# Altium PCB omnibothub-power-one-usb.PcbDoc
Units mil, origin at the board's own origin, x right, y up, seen from the top; angles counter-clockwise.
Board outline 1230.8 x 3070.8 mil, 2 copper layers (Top Layer, Bottom Layer); 4 components, 3 nets, 21 pads, 4 vias.
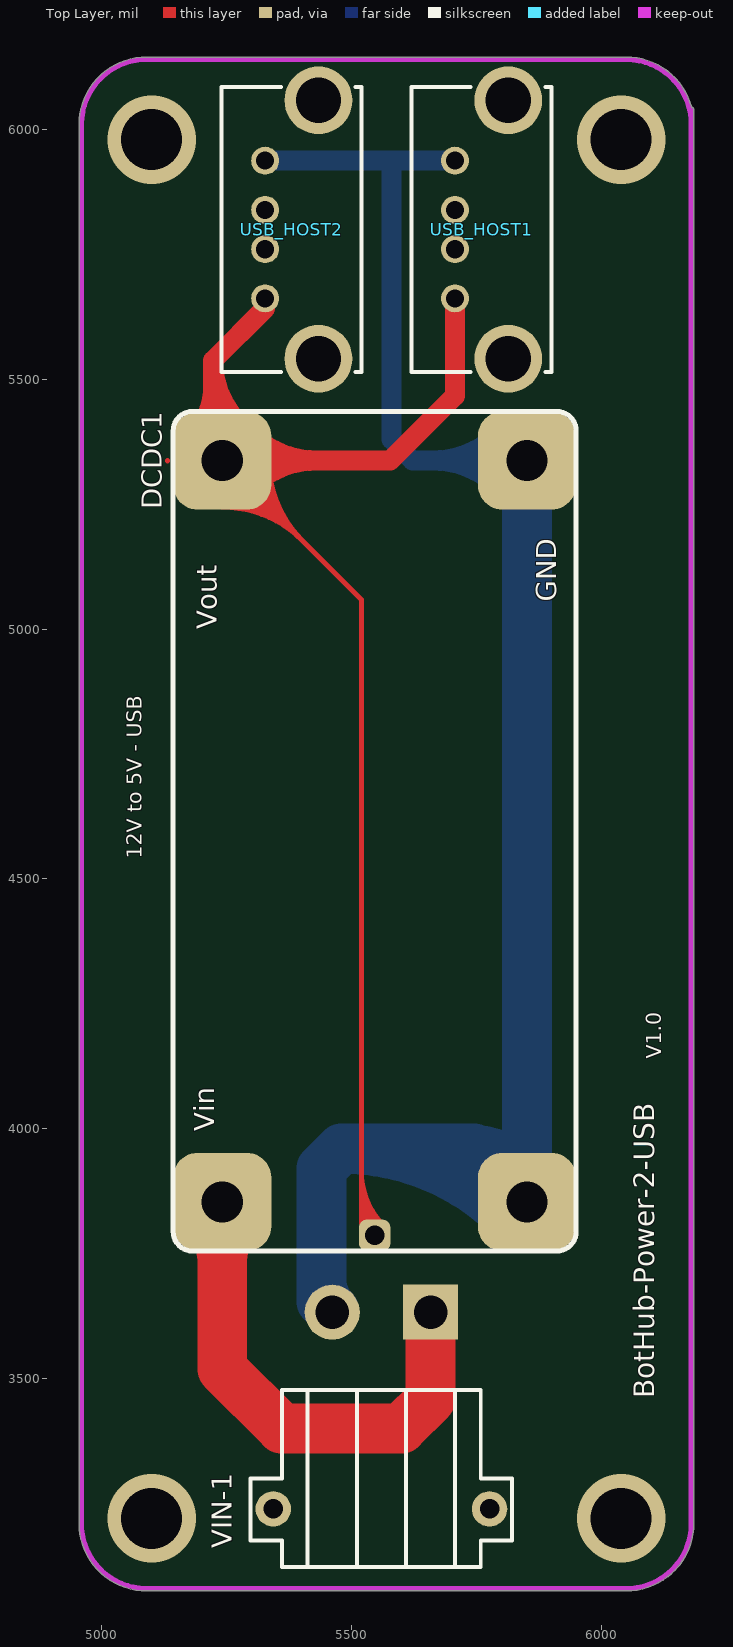
[diagram p0: Top Layer view]
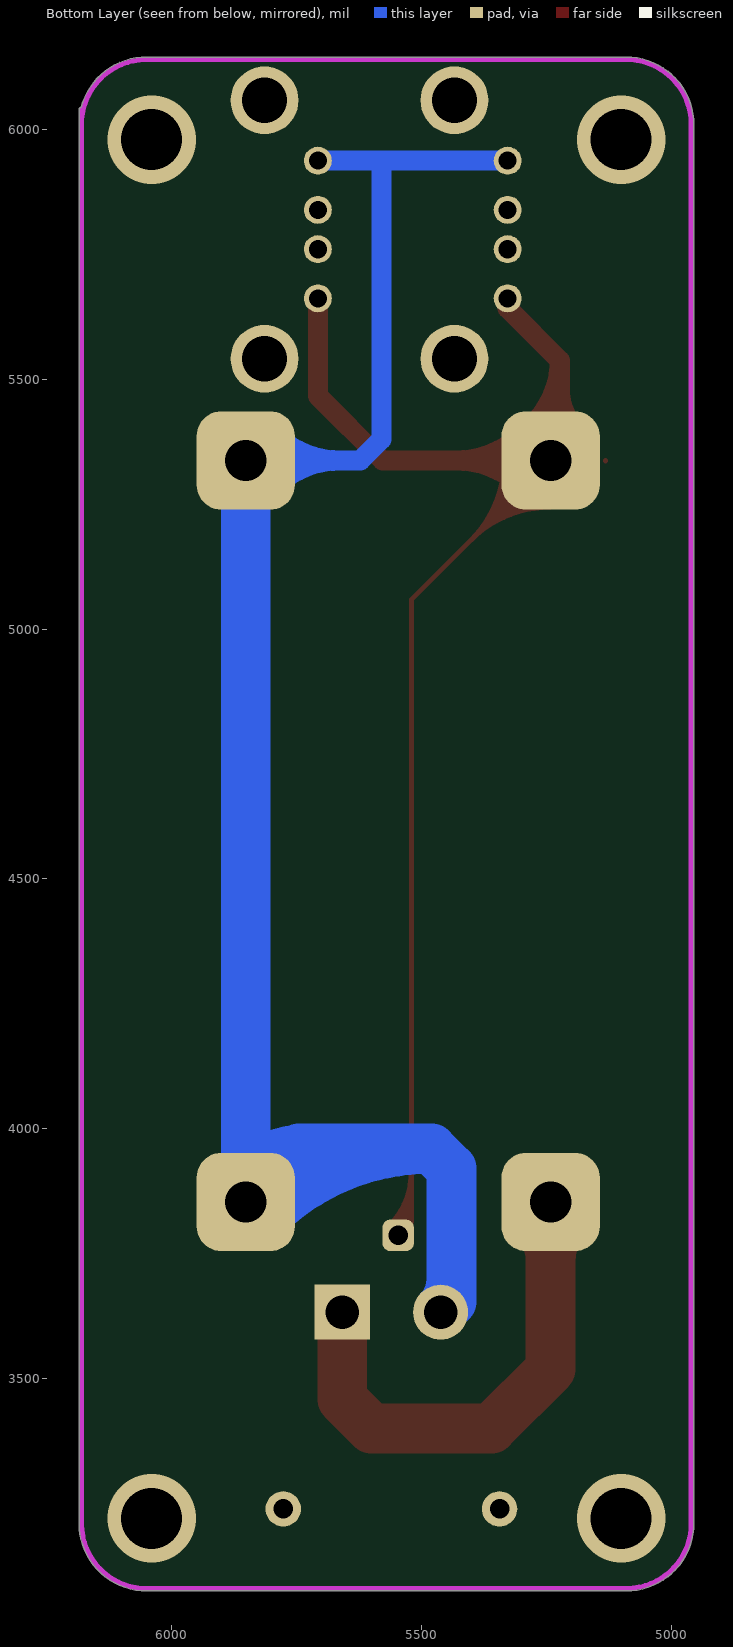
[diagram p1: Bottom Layer view, seen from below]

## Layer stack, top to bottom
Top Layer: signal copper 1.4
Dielectric: core 12.6, FR-4, Dk 4.8
Bottom Layer: signal copper 1.4

## Board outline
4955,3199.62 cw(c4960,3200) 4954.98,3200 4954.98,5999.81 cw(c5090,6010) 4955,6020.38 cw(c5090,6010) 5079.62,6145 cw(c5080,6140) 5080,6145.02 6039.81,6145.02 cw(c6050,6010) 6060.38,6145 cw(c6050,6010) 6180.81,6044.95 cw(c6180,6040) 6185.02,6040 6185.02,3220.19 cw(c6050,3210) 6185.4,3210 cw(c6050,3210) 6185,3199.62 cw(c6050,3210) 6060.38,3075 cw(c6060,3080) 6060,3074.99 5100.19,3074.99 cw(c5090,3210) 5079.62,3075 cw(c5090,3210)

## Design rules (kind name [scope] priority, off if disabled: settings)
Clearance Clearance_3 [(InPolygon) vs InNet('VCC_DJ')] p1: gap=30
Clearance Clearance_2 [(InPolygon) vs InNet('POWER')] p2: gap=30
Clearance Clearance_1 [(InPolygon)] p3: gap=10
Clearance [All] p4: gap=6
PlaneConnect [All] p1: planeconnectstyle=Direct reliefexpansion=20 reliefentries=4 reliefconductorwidth=10 reliefairgap=10
PolygonConnect [All] p1: connectstyle=Direct reliefconductorwidth=10 reliefentries=4 polygonreliefangle="90 Angle"
RoutingVias [All] p1: holewidth=28 width=50 viastyle="Through Hole" minholewidth=16 minwidth=25 maxholewidth=28 maxwidth=50
SilkscreenOverComponentPads [All] p1: minsilkscreentomaskgap=10
SolderMaskExpansion [All] p1: expansion=4
TestPointUsage FabricationTestPointUsage [All] p1: valid=0 allowmultiple=FALSE
Testpoint FabricationTestpoint [All] p1: side=3 testpointundercomponent=TRUE minsize=40 maxsize=100 preferedsize=60 minholesize=0 maxholesize=40 preferedholesize=32 testpointgrid=1 style=297 order=0-112345678
Width [All] p1: maxlimit=100 minlimit=10 preferedwidth=10 minimp=50.000000 maximp=50.000000 favimp=50.000000
22 further rules are at their usual default settings.

## Components (designator, comment, footprint, x,y, rotation, side; value= is the part's Value field where it differs from the comment)
DCDC1 "Header 2X2" DCDC-1 5480,4500 r90 top locked
USB_HOST1 "USB-A" 614004135023 5760,5800 r90 top
USB_HOST2 "USB-A" 614004135023 5380,5800 r90 top
VIN-1 "Header 2" AMASS-XT30PW-M 5560,3300 r180 top

## Footprints (in the part's own frame and the unit in brackets; to place one, negate y for a bottom-side part, rotate by r counter-clockwise, add the part's x,y. Pads: shape width x height; smd on the part's side, far side on the other; paste and mask are expansions set on the pad)
614004135023 [mm] "USB 2.0 Type A Vertical"
  round 1.42 hole 0.92: 1(-3.5,1.34) 2(-1,1.34) 3(1,1.34) 4(3.5,1.34)
  round 3.45 hole 2.3: Shell(-6.57,-1.37) Shell(6.57,-1.37)
  silkscreen extent -7.25,-3.56 7.25,3.56
AMASS-XT30PW-M [mm] "TH, 4-Leads, Body 13.95x13.3mm"
  rect 2.8x2.8 hole 1.7: 1(-2.5,-8.45)
  round 2.8 hole 1.7: 2(2.5,-8.45)
  round 1.8 hole 1: MP1(-5.5,1.55) MP2(5.5,1.55)
  silkscreen extent -6.65,-4.5 6.65,4.5
DCDC-1 [mm] "TH, 4-Leads, Body 13.95x13.3mm"
  rrect50% 5x5 hole 2.1: 1(-16.423,6.062) 2(21.277,6.062) 3(-16.423,-9.438) 4(21.277,-9.438)
  rrect50% 1.6x1.6 hole 1: 2(-18.123,-1.688)
  silkscreen extent -18.92,-11.94 23.78,8.56

## Part data
DCDC1: "Header, 2-Pin, Dual row"
VIN-1: "Header, 2-Pin"

## Via types
v1: diameter 177.17, hole 122.05, Top Layer to Bottom Layer, 4 vias

## Nets (pads, with @x,y where several pads share a name; then routed paths per layer and width w, separated by ;. In a path a pad name is that pad's centre, name@x,y a point inside that pad or via, vN(x,y) a via of type N, cw(c..) or ccw(c..) an arc to the next point about the centre after c; other vN are vias at no path point)
GND: DCDC1.3 DCDC1.4 USB_HOST1.4 USB_HOST2.4 VIN-1.2 | length 4550.7
  Bottom Layer w40: USB_HOST2.4@5347.24,5937.81 5580,5937.81 ; USB_HOST1.4@5687.24,5937.81 5580,5937.81 ; DCDC1.4@5796.12,5282.22 ccw(c5662.24,5148.34) 5662.24,5337.68 ccw(c5662.24,5527.01) DCDC1.4@5796.12,5393.13 ; DCDC1.4 5622.32,5337.68 5580,5380 5580,5937.81
  Bottom Layer w100: 5440,3697.12 ccw(c5526.02,3697.12) VIN-1.2@5465.19,3636.3 ; VIN-1.2 5440,3654.25 5440,3920 5480,3960 ; 5719.73,3960 cw(c5719.73,3722.9) DCDC1.3@5888.23,3889.71 ; DCDC1.3@5803.15,3853.43 ccw(c5686.24,3853.43) 5768.91,3936.09 ccw(c5851.57,4018.76) DCDC1.3@5851.57,3901.85 ; DCDC1.3@5817.16,3819.36 ccw(c5480.02,3485.58) 5480.02,3960 ; DCDC1.4 DCDC1.3 5745,3960 5480,3960
V5-1: DCDC1.2 USB_HOST1.1 USB_HOST2.1 | length 5371.4
  Top Layer w10: DCDC1.2@5241.34,5244.25 cw(c5241.34,5018.7) 5400.83,5178.19 cw(c5560.31,5337.68) DCDC1.2@5334.76,5337.68 ; DCDC1.2@5241.34,5254.25 cw(c5241.34,5052.85) 5383.75,5195.26 cw(c5526.17,5337.68) DCDC1.2@5324.76,5337.68 ; DCDC1.2@5241.34,5264.25 cw(c5241.34,5086.99) 5366.68,5212.33 cw(c5492.03,5337.68) DCDC1.2@5314.76,5337.68 ; DCDC1.2@5241.34,5274.25 cw(c5241.34,5121.13) 5349.61,5229.4 cw(c5457.89,5337.68) DCDC1.2@5304.76,5337.68 ; DCDC1.2@5241.34,5284.25 cw(c5241.34,5155.27) 5332.54,5246.47 cw(c5423.74,5337.68) DCDC1.2@5294.76,5337.68 ; DCDC1.2@5241.34,5294.25 cw(c5241.34,5189.41) 5315.47,5263.55 cw(c5389.6,5337.68) DCDC1.2@5284.76,5337.68 ; DCDC1.2@5241.34,5337.68 5520,5059.02 5520,3812.95 DCDC1.2@5546.46,3786.5 ; 5520,3817.77 ccw(c5577.73,3817.77) DCDC1.2@5536.91,3776.95 ; 5520,3841.91 ccw(c5601.87,3841.91) DCDC1.2@5543.98,3784.02 ; 5520,3866.05 ccw(c5626.01,3866.05) DCDC1.2@5551.05,3791.09 ; 5520,3890.19 ccw(c5650.15,3890.19) DCDC1.2@5558.12,3798.16 ; 5520,3914.34 ccw(c5674.3,3914.34) DCDC1.2@5565.19,3805.23
  Top Layer w40: DCDC1.2@5185.88,5393.13 ccw(c5096.39,5482.63) 5222.95,5482.63 ; DCDC1.2@5222.95,5356.06 5222.95,5537.93 5327.24,5642.22 USB_HOST2.1 ; 5222.95,5455.19 ccw(c5334.47,5455.19) DCDC1.2@5265.2,5367.79 ; 5222.95,5537.92 ccw(c5400.04,5537.92) DCDC1.2@5290.05,5399.14 ; DCDC1.2@5241.34,5337.68 5577.68,5337.68 5707.24,5467.24 USB_HOST1.1 ; DCDC1.2@5296.79,5282.22 cw(c5430.67,5148.34) 5430.67,5337.68 cw(c5430.67,5527.01) DCDC1.2@5296.79,5393.13
V12: DCDC1.1 VIN-1.1 | length 1183.1
  Top Layer w100: DCDC1.1@5207.1,3819.18 cw(c5124.43,3736.52) 5241.34,3736.52 cw(c5358.25,3736.52) DCDC1.1@5275.58,3819.18 ; DCDC1.1 5241.34,3518.66 5360,3400 5600,3400 5658.43,3458.43 5658.43,3520 VIN-1.1
pads on no net: USB_HOST1.2 USB_HOST1.3 USB_HOST1.Shell USB_HOST2.2 USB_HOST2.3 USB_HOST2.Shell VIN-1.MP1 VIN-1.MP2
copper on no net: | length 1.3
  Top Layer w10: 5131.91,5336.34 5131.91,5337.68
  other v1: 5100,3220 6040,3220 5100,5980 6040,5980

## Keep-outs
Keep-Out Layer:
  lines w10: 4960,6000 cw(c5090,6010) 5080,6140 6060,6140 ; 4960,6020 4960,3200 ccw(c5090,3210) 5100,3080 ; 5080,3080 6060,3080 ccw(c6050,3210) 6180,3220 ; 6040,6140 cw(c6050,6010) 6180,6020 ; 6180,3200 6180,6040

## Silkscreen, mask and mechanical layers (free items; w line width, h text height)
Top Overlay:
  text "12V to 5V - USB" at 5080,4540 h30 r90
  text "V1.0" at 6120,4140 h30 r90
  text "BotHub-Power-2-USB" at 6120,3460 h70 r90

## Text inside footprints (layer, text, board x,y; h text height)
DCDC1: Top Overlay "Vin" at 5225,3995 h40 r90; Top Overlay "Vout" at 5230,5000 h40 r90; Top Overlay "GND" at 5910,5055 h40 r90